# Altium PCB LION_TRACKER_PANEL.PcbDoc
Units mm, origin at the board's own origin, x right, y up, seen from the top; angles counter-clockwise.
Board outline 144.5 x 102.2 mm, 2 copper layers (Top Layer, Bottom Layer), stack 1.671 mm thick; 8 components, 0 nets, 12 pads, 0 vias.
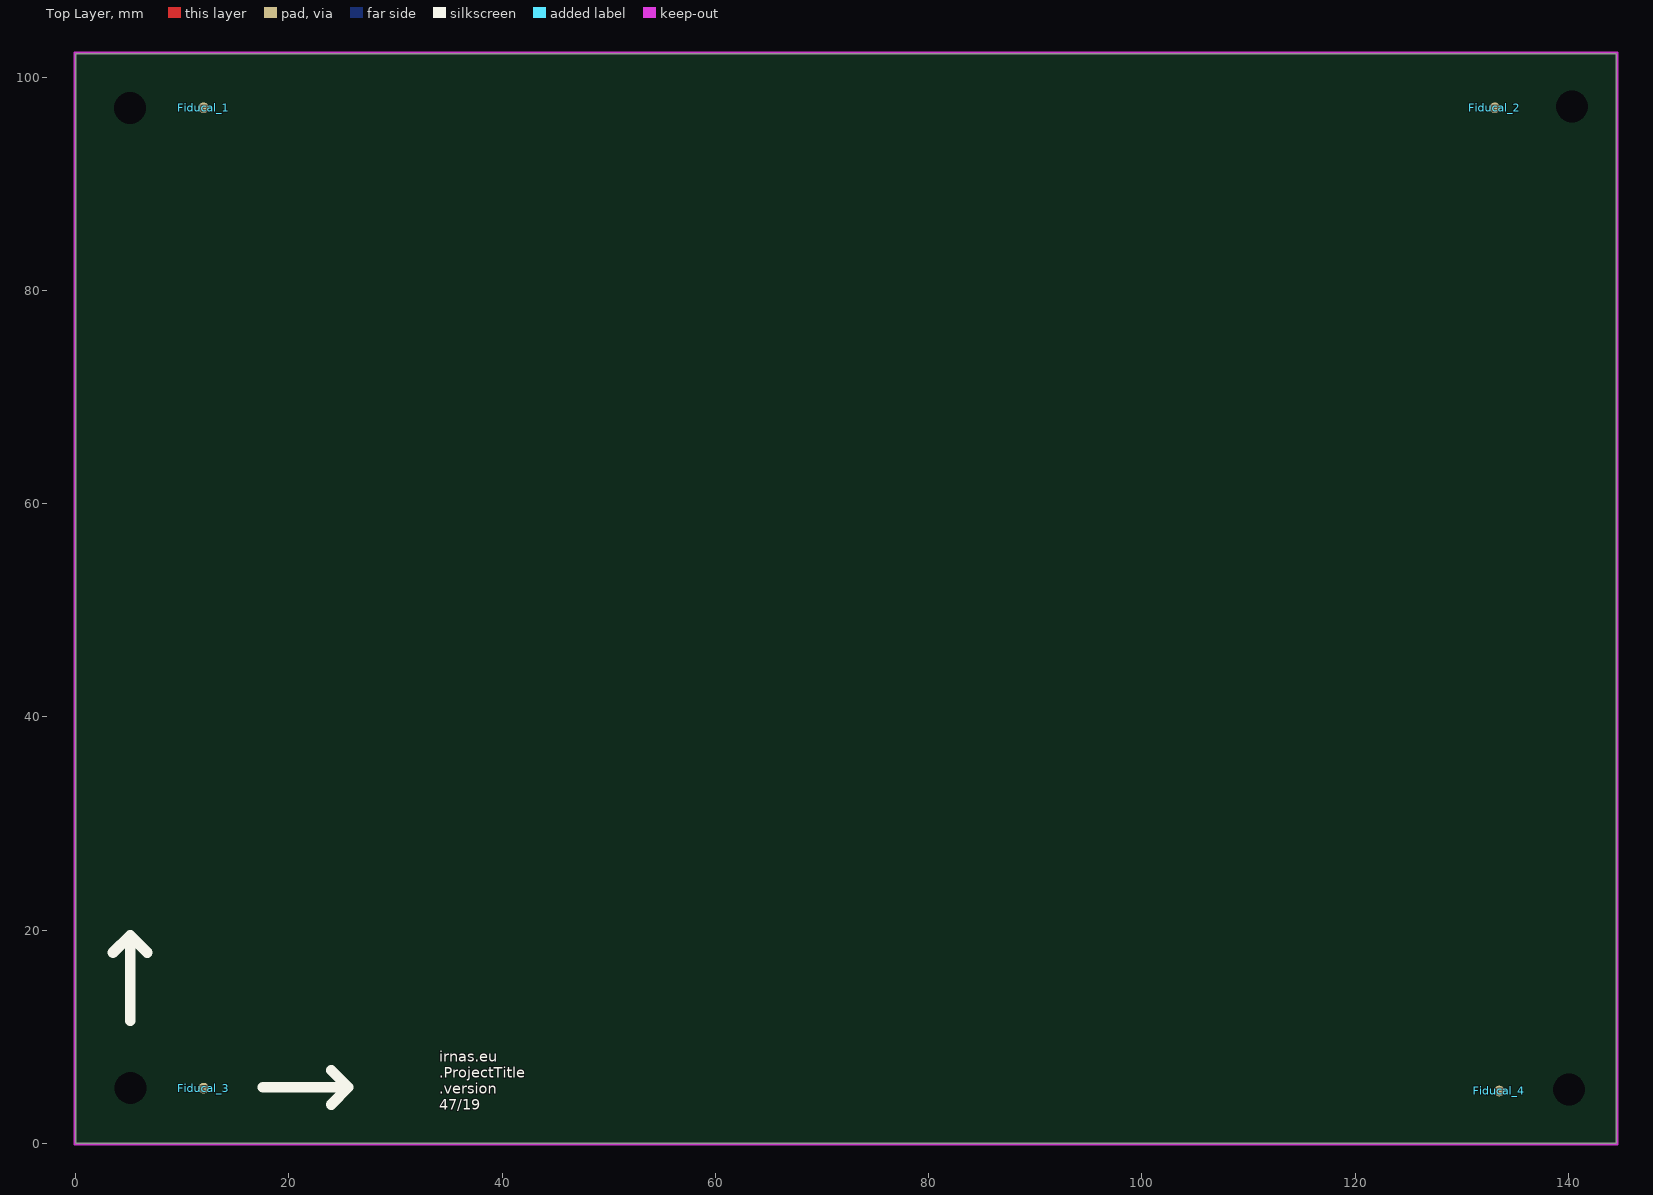
[diagram p0: Top Layer view]
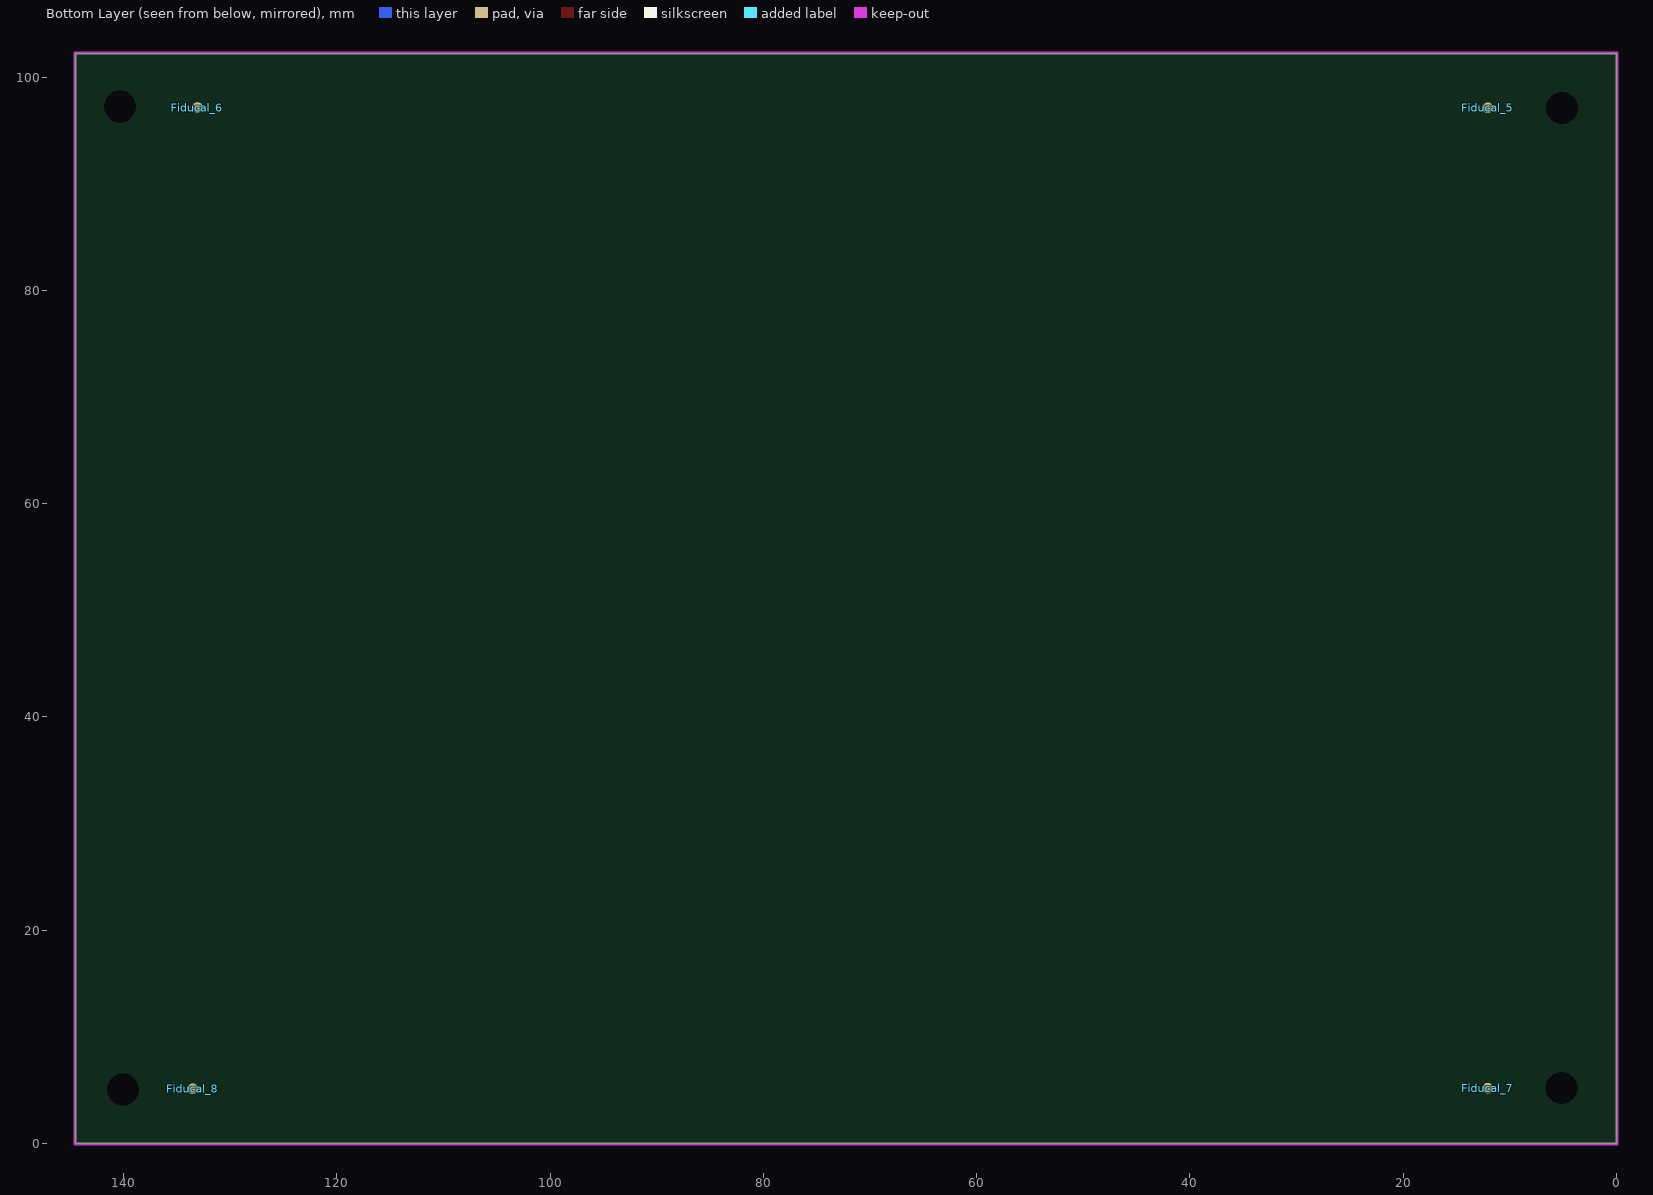
[diagram p1: Bottom Layer view, seen from below]

## Layer stack, top to bottom
Top Solder: solder mask 0.0102, Solder Resist, Dk 3.5
Top Layer: signal copper 0.0356
Dielectric 1: dielectric 1.6, FR-4, Dk 4.8
Bottom Layer: signal copper 0.0356
Bottom Solder: solder mask 0.0102, Solder Resist, Dk 3.5

## Board outline
0,0 144.5,0 144.5,102.2 0,102.2

## Design rules (kind name [scope] priority, off if disabled: settings)
Clearance [All] p1: gap=0.254 ignorepadtopadclearanceinfootprint=FALSE except(0: Arc-Hole Track-Hole SMDPad-Hole THPad-Hole Via-Hole Fill-Hole Poly-Hole Region-Hole Text-Hole)
PolygonConnect [All] p1: connectstyle=Relief reliefconductorwidth=0.254 reliefentries=4 polygonreliefangle="90 Angle" airgapwidth=0.254
RoutingVias [All] p1: holewidth=0.711 width=1.27 viastyle="Through Hole" minholewidth=0.711 minwidth=1.27 maxholewidth=0.711 maxwidth=1.27
SolderMaskExpansion [All] p1: expansion=0.102 istentingtop=FALSE
Width [All] p1: maxlimit=0.254 minlimit=0.254 preferedwidth=0.254
30 further rules are at their usual default settings.

## Components (designator, comment, footprint, x,y, rotation, side; value= is the part's Value field where it differs from the comment)
Fiducal_1 "Comment" FIDUCAL 12,97.11 r90 top
Fiducal_2 "Comment" FIDUCAL 133.1,97.11 r90 top
Fiducal_3 "Comment" FIDUCAL 12,5.18 r90 top
Fiducal_4 "Comment" FIDUCAL 133.52,4.91 r90 top
Fiducal_5 "Comment" FIDUCAL 12.05,97.11 r90 bottom
Fiducal_6 "Comment" FIDUCAL 133.07,97.14 r90 bottom
Fiducal_7 "Comment" FIDUCAL 12.05,5.18 r90 bottom
Fiducal_8 "Comment" FIDUCAL 133.52,5.11 r90 bottom

## Footprints (in the part's own frame and the unit in brackets; to place one, negate y for a bottom-side part, rotate by r counter-clockwise, add the part's x,y. Pads: shape width x height; smd on the part's side, far side on the other; paste and mask are expansions set on the pad)
FIDUCAL [mm] "FIDUCAL MARKER"
  round 1 smd mask+1: FM(0,0)
  Top Layer pour cut-out: -1.5,0 -1.386,-0.574 -1.061,-1.061 -0.574,-1.386 0,-1.5 0,-1.5 0.574,-1.386 1.061,-1.061 1.386,-0.574 1.5,0 1.5,0 1.386,0.574 1.061,1.061 0.574,1.386 0,1.5 0,1.5 -0.574,1.386 -1.061,1.061 -1.386,0.574 -1.5,0

## Free pads (board coordinates)
  round 1 hole 3: 10(5.11,97.11) 11(140.34,97.25) 12(140.06,5.06) 13(5.15,5.18)

## Nets (pads, with @x,y where several pads share a name; then routed paths per layer and width w, separated by ;. In a path a pad name is that pad's centre, name@x,y a point inside that pad or via, vN(x,y) a via of type N, cw(c..) or ccw(c..) an arc to the next point about the centre after c; other vN are vias at no path point)
pads on no net: Fiducal_1.FM Fiducal_2.FM Fiducal_3.FM Fiducal_4.FM Fiducal_5.FM Fiducal_6.FM Fiducal_7.FM Fiducal_8.FM

## Keep-outs
Keep-Out Layer:
  region: 0.2,102.3
  lines w0.2: -0.1,-0.1 144.6,-0.1 144.6,102.3 1.08,102.3 0.2,102.3 -0.1,102.3 -0.1,-0.1

## Silkscreen, mask and mechanical layers (free items; w line width, h text height)
Top Overlay:
  lines w1: 3.51,17.9 5.11,19.5 ; 5.11,11.51 5.11,19.5 ; 6.71,17.9 5.11,19.5 ; 17.58,5.25 25.57,5.25 ; 23.97,3.65 25.57,5.25 ; 23.97,6.85 25.57,5.25
  text "irnas.eu / .ProjectTitle / .version / 47/19" at 34.11,3.15 h1
V Cut:
  lines w0.2: -5,9.85 150,9.85 ; -5,92.07 150,92.07 ; 9.89,-5 9.89,105 ; 32.11,-5 32.11,105 ; 35.89,-5 35.89,105 ; 58.1,-5 58.1,105 ; 61.9,-5 61.9,105 ; 84.1,-5 84.1,105 ; 87.89,-5 87.89,105 ; 110.11,-5 110.11,105 ; 113.89,-5 113.89,105 ; 136.1,-5 136.1,105
  text "V-CUT" at 62.87,105.64 h2 r90
  text "V-CUT" at 137.13,105.64 h2 r90
  text "V-CUT" at 111.2,105.54 h2 r90
  text "V-CUT" at 59.22,105.5 h2 r90
  text "V-CUT" at 85.15,105.5 h2 r90
  text "V-CUT" at 88.95,105.5 h2 r90
  text "V-CUT" at 10.99,105.45 h2 r90
  text "V-CUT" at 33.22,105.46 h2 r90
  text "V-CUT" at 114.8,105.45 h2 r90
  text "V-CUT" at 36.97,105.41 h2 r90
  text "V-CUT" at 151.18,91.48 h2
  text "V-CUT" at -14.86,91.02 h2
  text "V-CUT" at 150.87,8.95 h2
  text "V-CUT" at -15.02,8.91 h2
  text "V-CUT" at 88.9,-14.77 h2 r90
  text "V-CUT" at 114.96,-14.77 h2 r90
  text "V-CUT" at 62.84,-14.83 h2 r90
  text "V-CUT" at 59.24,-14.95 h2 r90
  text "V-CUT" at 84.99,-15.02 h2 r90
  text "V-CUT" at 111.11,-15.02 h2 r90
  text "V-CUT" at 137.11,-15.02 h2 r90
  text "V-CUT" at 36.96,-15.14 h2 r90
  text "V-CUT" at 33.11,-15.4 h2 r90
  text "V-CUT" at 11.09,-15.46 h2 r90

## Dimensions
144.6,102.3 to 144.6,-0.1 on Mechanical 1
144.6,102.3 to -0.1,102.3 on Mechanical 1

## Panel: embedded boards
"LION_TRACKER.PcbDoc" at 10,9.96, 1 rows x 5 columns, spacing 63.5 x 26, rotation 0